# EAGLE board xerc2-5 (EAGLE 7.5.0)

Size 44.12 x 31.74 mm. Coordinates in mm from the lower left corner, seen from the top.
Outline: 0,0 44.12,0 44.12,31.74 0,31.74 0,0
Copper layers (1*16): Top 0.035mm / dielectric 1.5mm / Bottom 0.035mm
Design rules "default": minimum track width 10mil, minimum drill 24mil, track to track 8mil, track to pad 8mil, pad to pad 8mil, via to via 8mil, smd to smd 8mil, copper to edge 40mil, drill to drill 8mil, minimum pad ring 10mil, minimum via ring 8mil, stop-mask expansion 4mil, vias tented up to drill 0mil, thermal gap 10mil

## Footprints (pad centres in the part's own frame; a part is rotated, then mirrored left to right if it is on the bottom)
0603-CAP = smd 1.1 x 1: 1 -0.85,0; 2 0.85,0
SOD-323F = smd 1 x 0.8: A -1,0; C 1,0
SMD2,54-5,08 = smd 2.54 x 5.08: 1 0,0
SOT23 = smd 1 x 1.4: 1 -0.95,-1.1; 2 0.95,-1.1; 3 0,1.1
0603-RES = smd 1.1 x 1: 1 -0.85,0; 2 0.85,0
SO08-EIAJ = smd 0.61 x 2.21: 1 -1.905,-3.378; 2 -0.635,-3.378; 3 0.635,-3.378; 4 1.905,-3.378; 5 1.905,3.353; 6 0.635,3.353; 7 -0.635,3.353; 8 -1.905,3.353

## Placement (x,y rotation side)
C1  4.7uf  [0603-CAP]  21.59,6.35 0 top
C2  0.1uF  [0603-CAP]  15.24,22.86 0 top
D1  [SOD-323F]  12.7,16.51 90 top
DONGLE  [SMD2,54-5,08]  5.08,16.51 90 top
EB  [SMD2,54-5,08]  26.67,2.54 90 top
GND  [SMD2,54-5,08]  5.08,3.81 90 top
IR+  [SMD2,54-5,08]  26.67,21.59 90 top
IR-  [SMD2,54-5,08]  26.67,17.78 90 top
IRD  [SMD2,54-5,08]  26.67,10.16 90 top
MMBT3906  Q1  [SOT23]  19.05,26.67 270 top
PB  [SMD2,54-5,08]  26.67,6.35 90 top
PO  [SMD2,54-5,08]  26.67,13.97 90 top
PWR  [SMD2,54-5,08]  5.08,10.16 90 top
R1  10k  [0603-RES]  10.16,20.32 0 top
R2  10k  [0603-RES]  21.59,19.05 0 top
R3  100  [0603-RES]  5.08,20.32 0 top
R4  10k  [0603-RES]  17.78,16.51 0 top
SL  [SMD2,54-5,08]  26.67,25.4 90 top
U1  Tiny85-20-SMT  [SO08-EIAJ]  15.24,6.35 0 top

## Library data of the parts
C1 = SparkFun-Capacitors
C2 = SparkFun-Capacitors; PROD_ID: CAP-00810
D1 = adafruit
DONGLE EB GND IR+ IR- IRD PB PO PWR SL = wirepad
MMBT3906 = transistor-pnp
R1 R3 = SparkFun-Resistors
R2 R4 = SparkFun-Passives
U1 = SparkFun-DigitalIC; PROD_ID: IC-09092

## Nets
GND: C1.2 C2.1 GND.1 IR-.1 U1.4
N$1: PB.1 U1.3
N$2: R1.1 U1.1
N$3: EB.1 U1.2
N$4: D1.A IRD.1 U1.7
N$5: R2.2 U1.6
N$6: MMBT3906.1 R2.1
N$7: MMBT3906.3 SL.1
N$8: C1.1 IR+.1 R3.2
N$9: R4.2 U1.5
N$10: PO.1 R4.1
N$11: D1.C DONGLE.1
VCC: C2.2 MMBT3906.2 PWR.1 R1.2 R3.1 U1.8

## Tracks (layer width: path | path; a pad name or v marks a point on that pad's centre or on a via)
GND  (4 unrouted)
N$1  (1 unrouted)
N$2  (1 unrouted)
N$3  (1 unrouted)
N$4  (2 unrouted)
N$5  (1 unrouted)
N$6  (1 unrouted)
N$7  (1 unrouted)
N$8  (2 unrouted)
N$9  (1 unrouted)
N$10  (1 unrouted)
N$11  (1 unrouted)
VCC  (5 unrouted)